# Altium PCB RS485.PcbDoc
Units mil, origin at the board's own origin, x right, y up, seen from the top; angles counter-clockwise.
Board outline not stored, 2 copper layers (Top Layer, Bottom Layer); 9 components, 0 nets, 25 pads, 6 vias.
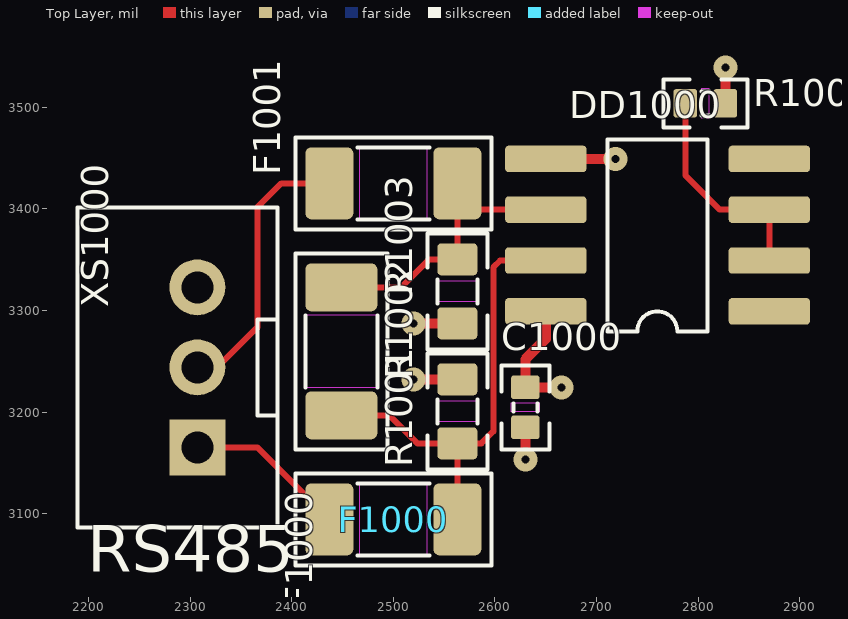
[diagram p0: Top Layer view]
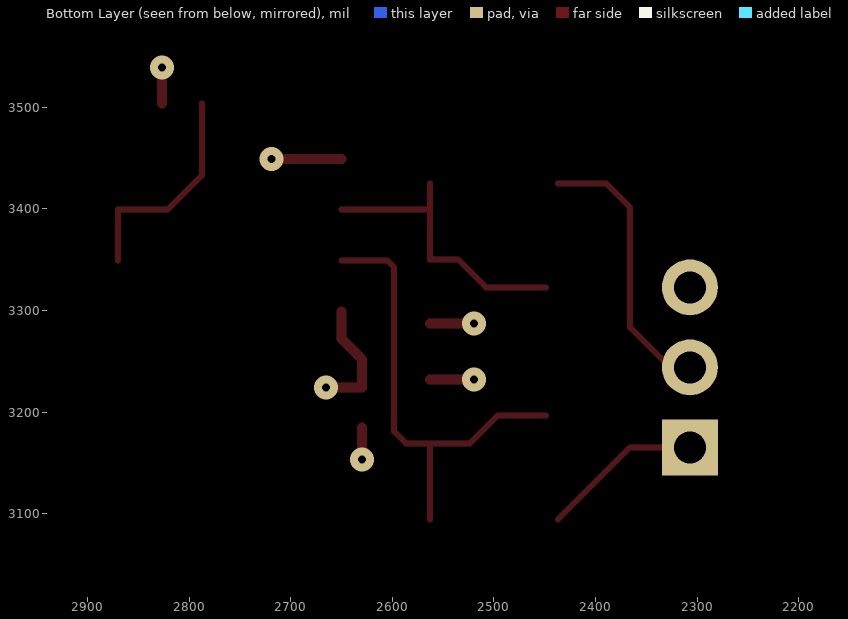
[diagram p1: Bottom Layer view, seen from below]

## Layer stack, top to bottom
Top Solder: solder mask 0.4, Solder Resist, Dk 3.5
Top Layer: signal copper 1.4
Dielectric 1: dielectric 12.6, FR-4, Dk 4.8
Bottom Layer: signal copper 1.4
Bottom Solder: solder mask 0.4, Solder Resist, Dk 3.5

## Components (designator, comment, footprint, x,y, rotation, side; value= is the part's Value field where it differs from the comment)
C1000 "0,1" CAP0402 2629.92,3204.72 r270 top
DD1000 "MAX13443" SO8-3.9 2870.08,3299.21 r180 top
F1000 "0,12A" MF-NSMF 2562.99,3094.49 r180 top
F1001 "0,12A" MF-NSMF 2562.99,3425.2 r180 top
R1000 "10K" RES0402 2807.09,3503.94 r0 top
R1001 "560" RES0603 2562.99,3200.79 r90 top
R1002 "120" RES1206 2448.82,3259.84 r270 top
R1003 "560" RES0603 2562.99,3318.9 r270 top
XS1000 "RS485" MW-3M 2307.09,3165.35 r90 top

## Footprints (in the part's own frame and the unit in brackets; to place one, negate y for a bottom-side part, rotate by r counter-clockwise, add the part's x,y. Pads: shape width x height; smd on the part's side, far side on the other; paste and mask are expansions set on the pad)
CAP0402 [mm]
  rrect25% 0.59x0.72 smd: 1(-0.5,0) 2(0.5,0)
  Top Layer keep-out region: -0.1,0.36 -0.1,-0.36 0.1,-0.36 0.1,0.36
  silkscreen extent -1.05,-0.6 1.05,0.6, body extent -0.5,-0.25 0.5,0.25, height 0.49
MF-NSMF [mm]
  rrect25% 1.2x1.8 smd: 1(0,0) 2(3.2,0)
  Top Layer keep-out region: 0.75,-0.9 2.45,-0.9 2.45,0.9 0.75,0.9
  silkscreen extent -0.85,-1.15 4.05,1.15, body extent 0,-0.82 3.2,0.78, height 0.7
MW-3M [mm]
  rect 1.4x1.4 hole 0.8: 1(0,0)
  round 1.4 hole 0.8: 2(2,0) 3(4,0)
  silkscreen extent -2,-2 6,3, body extent -2,-2 6,3, height 6
RES0402 [mm]
  rrect25% 0.59x0.72 smd: 1(-0.5,0) 2(0.5,0)
  Top Layer keep-out region: -0.1,0.36 -0.1,-0.36 0.1,-0.36 0.1,0.36
  silkscreen extent -1.05,-0.6 1.05,0.6, body extent -0.5,-0.25 0.5,0.25, height 0.33
RES0603 [mm]
  rrect25% 0.8x1 smd: 1(-0.8,0) 2(0.8,0)
  Top Layer keep-out region: -0.25,0.5 -0.25,-0.5 0.25,-0.5 0.25,0.5
  silkscreen extent -1.45,-0.75 1.45,0.75, body extent -0.77,-0.42 0.78,0.43, height 0.51
RES1206 [mm]
  rrect25% 1.2x1.8 smd: 1(-1.6,0) 2(1.6,0)
  Top Layer keep-out region: -0.9,-0.9 0.9,-0.9 0.9,0.9 -0.9,0.9
  silkscreen extent -2.45,-1.15 2.45,1.15, body extent -1.6,-0.8 1.6,0.8, height 0.61
SO8-3.9 [mil]
  rrect25% 80x26 smd: 1(0,0) 2(0,-50) 3(0,-100) 4(0,-150) 5(220,-150) 6(220,-100) 7(220,-50) 8(220,0)
  silkscreen extent 61,-169 159,20, body extent -8,-173 229,24, height 69

## Part data
C1000: library part CAP_0402, "Конденсатор чип"
DD1000: "Интерфейс RS485"
F1000 F1001: library part MF-NSMF, "Предохранитель самовосстанавливающийся"
R1000: library part RES_0402, "Резистор чип"
R1001 R1003: library part RES_0603, "Резистор чип"
R1002: library part RES_1206, "Резистор чип"
XS1000: library part Разъем3_1, "Разъем"

## Via types
v1: diameter 23.62, hole 7.87, Top Layer to Bottom Layer, tented both sides, 6 vias

## Nets (pads, with @x,y where several pads share a name; then routed paths per layer and width w, separated by ;. In a path a pad name is that pad's centre, name@x,y a point inside that pad or via, vN(x,y) a via of type N, cw(c..) or ccw(c..) an arc to the next point about the centre after c; other vN are vias at no path point)
pads on no net: C1000.1 C1000.2 DD1000.1 DD1000.2 DD1000.3 DD1000.4 DD1000.5 DD1000.6 DD1000.7 DD1000.8 F1000.1 F1000.2 F1001.1 F1001.2 R1000.1 R1000.2 R1001.1 R1001.2 R1002.1 R1002.2 R1003.1 R1003.2 XS1000.1 XS1000.2 XS1000.3
copper on no net: | length 1736
  Top Layer w5.91: 2307.09,3165.35 2366.14,3165.35 2437.01,3094.49 ; 2307.09,3244.09 2326.77,3244.09 2366.14,3283.46 2366.14,3401.57 2389.76,3425.2 2437.01,3425.2 ; 2448.82,3196.85 2496.06,3196.85 2523.62,3169.29 2562.99,3169.29 ; 2448.82,3322.83 2507.87,3322.83 2535.43,3350.39 2562.99,3350.39 2562.99,3399.21 ; 2562.99,3094.49 2562.99,3169.29 ; 2562.99,3425.2 2562.99,3399.21 ; 2650.08,3349.21 2605.12,3349.21 2598.43,3342.52 2598.43,3181.1 2586.61,3169.29 2562.99,3169.29 ; 2650.08,3399.21 2562.99,3399.21 ; 2787.4,3503.94 2787.4,3433.07 2821.26,3399.21 2870.08,3399.21 2870.08,3349.21
  Top Layer w9.84: v1(2519.68,3232.28) 2562.99,3232.28 ; v1(2519.68,3287.4) 2562.99,3287.4 ; v1(2629.92,3153.54) 2629.92,3185.04 ; 2650.08,3299.21 2650.08,3272.13 2629.92,3251.97 2629.92,3224.41 v1(2665.35,3224.41) ; 2650.08,3449.21 v1(2718.9,3449.21) ; 2826.77,3503.94 v1(2826.77,3539.37)